# Altium PCB motordriver-v3.1_power-stage.PcbDoc
Units mil, origin at the board's own origin, x right, y up, seen from the top; angles counter-clockwise.
Board outline 6000 x 4000 mil, 2 copper layers (Top Layer, Bottom Layer); 18 components, 18 nets, 63 pads, 0 vias.
Unrouted connection lines stored in the file: 33.
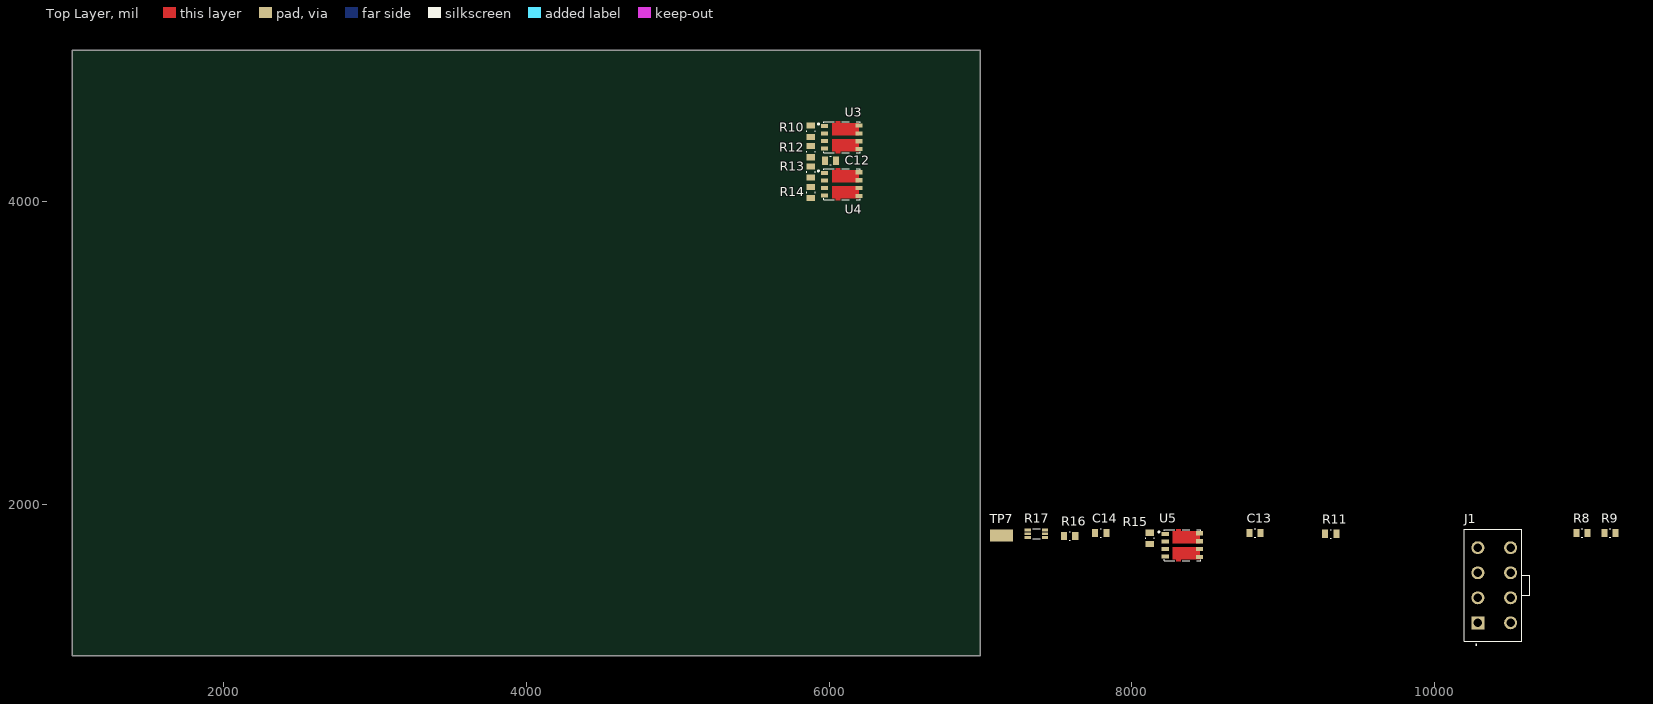
[diagram p0: Top Layer view]
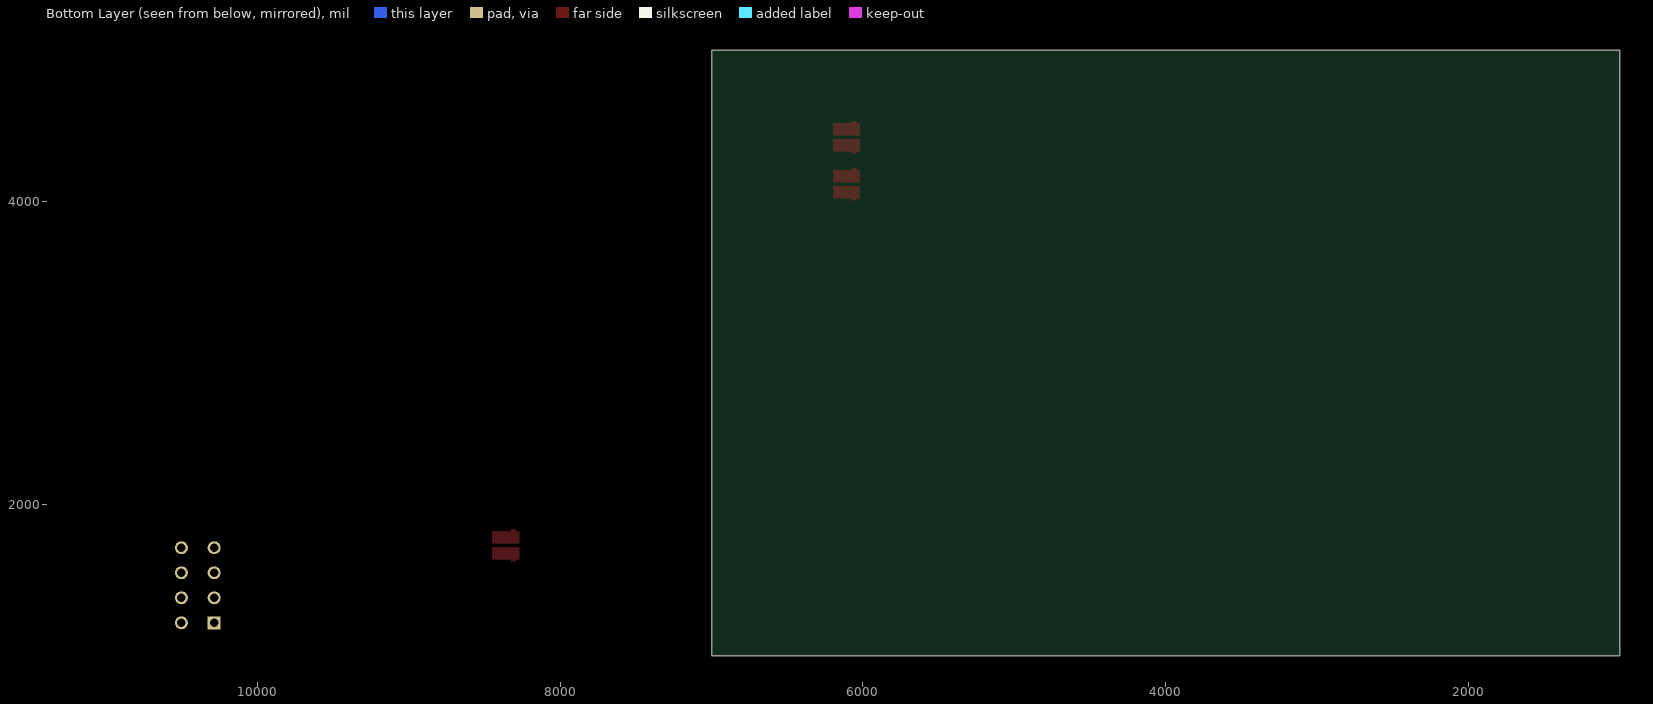
[diagram p1: Bottom Layer view, seen from below]

## Layer stack, top to bottom
Top Solder: solder mask 0.4, Solder Resist, Dk 3.5
Top Layer: signal copper 1.4
Dielectric 1: dielectric 12.6, FR-4, Dk 4.8
Bottom Layer: signal copper 1.4
Bottom Solder: solder mask 0.4, Solder Resist, Dk 3.5

## Board outline
1000,1000 7000,1000 7000,5000 1000,5000

## Design rules (kind name [scope] priority, off if disabled: settings)
Clearance [All] p1: gap=10 ignorepadtopadclearanceinfootprint=FALSE except(0: Arc-Hole Track-Hole SMDPad-Hole THPad-Hole Via-Hole Fill-Hole Poly-Hole Region-Hole Text-Hole)
PolygonConnect [All] p1: connectstyle=Relief reliefconductorwidth=10 reliefentries=4 polygonreliefangle="90 Angle" airgapwidth=10
RoomDefinition motordriver-v3.1_power-stage [InComponentClass('motordriver-v3.1_power-stage')] p1: confinementstyle=ConfineIn formatcopy=TRUE lockcomponents=FALSE outline 7045,1055 11595,1055 11595,1955 7045,1955
RoutingVias [All] p1: holewidth=28 width=50 viastyle="Through Hole" minholewidth=28 minwidth=50 maxholewidth=28 maxwidth=50
SolderMaskExpansion [All] p1: expansion=4 istentingtop=FALSE
Width [All] p1: maxlimit=10 minlimit=10 preferedwidth=10
30 further rules are at their usual default settings.

## Components (designator, comment, footprint, x,y, rotation, side; value= is the part's Value field where it differs from the comment)
C12 "100nF 50V" 0805 6010,4270 r0 top value=100nF
C13 "100nF 50V" 0805 8815,1810 r0 top value=100nF
C14 "100nF 50V" 0805 7795,1810 r0 top value=100nF
J1 "Motor Molex Connector" MOLEX_0039281083 10395,1465 r90 top value=N/A
R8 "10k" 0805 10975,1810 r0 top
R9 "10k" 0805 11160,1810 r0 top
R10 "495k" 0805 5880,4465 r270 top
R11 "10k" 0805 9315,1805 r0 top
R12 "495k" 0805 5880,4330 r270 top
R13 "495k" 0805 5880,4195 r270 top
R14 "495k" 0805 5880,4060 r270 top
R15 "495k" 0805 8120,1775 r270 top
R16 "495k" 0805 7590,1790 r0 top
R17 "RES 20m 1W" "1206 - Sense" 7370,1805 r0 top
TP7 "Test Point - 5019" TP380X203 7140,1795 r0 top
U3 "NOTE: Nearing End of Life" PG-TDSON-8-10 6085,4425 r0 top
U4 "NOTE: Nearing End of Life" PG-TDSON-8-10 6085,4115 r0 top
U5 "NOTE: Nearing End of Life" PG-TDSON-8-10 8335,1730 r0 top

## Footprints (in the part's own frame and the unit in brackets; to place one, negate y for a bottom-side part, rotate by r counter-clockwise, add the part's x,y. Pads: shape width x height; smd on the part's side, far side on the other; paste and mask are expansions set on the pad)
0805 [mil]
  rect 40x55 smd: 1(-37,0) 2(37,0)
  silkscreen extent -4,-28 4,28, body extent -47,-28 47,28, height 24
"1206 - Sense" [mil] "4-Wire Sense Footprint"
  rect 41.34x20 smd: 1(-57,-24) 1(-57,24) 2(57,-24) 2(57,24)
  rect 41.34x15 smd paste+0: 3(-57,0) 4(57,0)
  silkscreen extent -24,-33 24,33
MOLEX_0039281083 [mm]
  rect 2.175x2.175 hole 1.45: 1(-6.3,2.75)
  round 2.175 hole 1.45: 2(-2.1,2.75) 3(2.1,2.75) 4(6.3,2.75) 5(-6.3,-2.75) 6(-2.1,-2.75) 7(2.1,-2.75) 8(6.3,-2.75)
  silkscreen extent -10.1,-6 9.4,5
PG-TDSON-8-10 [mm] "Infineon specific mosfet array footprint"
  rect 1.2x0.65 smd: 1(-2.89,1.905) 2(-2.89,0.635) 3(-2.89,-0.635) 4(-2.89,-1.905)
  rect 1.2x0.7 smd: 6(2.89,-1.99) 6(2.89,-0.66) 8(2.89,0.66) 8(2.89,1.99)
  Top Layer region: -1.04,-2.7 -0.25,-2.7 -0.25,-2.1 -1.04,-2.1
  Top Layer region: -1.04,2.1 -0.25,2.1 -0.25,2.7 -1.04,2.7
  Top Layer region: -1.64,2.33 2.84,2.33 2.87,2.33 2.87,0.32 -1.62,0.32 -1.64,0.32 -1.64,0.34
  Top Layer region: -1.64,-0.32 2.84,-0.32 2.87,-0.32 2.87,-2.33 -1.62,-2.33 -1.64,-2.33 -1.64,-2.31
  silkscreen extent -4.04,-2.6 3.08,2.6
TP380X203 [mm]
  rect 3.8x2.03 smd: 1(0,0)

## Part data
C12 C13 C14: library part "CAP 100nF 50V", "CAP CER 0.1UF 50V X7R 0805", Package=0805, Rating=50V, Tolerance=10%
J1: library part "CN HDR 8POS Motor Molex", "Connector Header Through Hole 8 position 0.165\" (4.20mm)", Supplier Part Number 1=WM3803-ND, Digikey=WM3803-ND, Digikey Link=https://www.digikey.ca/products/en?keywords=WM3803-ND, MF=Molex, MP=0039281083, Price="1.624 CAD", Supplier 1=Digi-Key
R8 R9 R11: library part "RES 10k 1/8W - 1%", "RES SMD 10K OHM 1% 1/8W 0805", Package=0805, Power (Watts)=0.125W, Tolerance=1%
R10 R12 R13 R14 R15 R16: library part "RES 495k 1/8W", "RES SMD 499K OHM 1% 1/8W 0805", Case Code (Imperial)=0805, Case Code (Metric)=2012, Manufacturer=Yageo, Manufacturer Part Number=RC0805FR-07499KL, Max Operating Temperature=155°C, Min Operating Temperature=-55°C, Power Rating=125mW, Resistance=499kR, Supplier Part Number 1=311-499KCRCT-ND, Temperature Coefficient=100ppm/°C, Tolerance=1%, Voltage Rating=150V, Case/Package=0805, Category="Chip SMD Resistors", ComponentLink1Description=https://datasheet.ciiva.com/15189/getdatasheetpartid-326570-15189975.pdf?src-supplier=Verical, ComponentLink1URL=https://datasheet.ciiva.com/15189/getdatasheetpartid-326570-15189975.pdf?src-supplier=Verical, Composition="Thick Film", Contact Plating=Tin,Lead,Matte, Depth=1.25mm, Lead Free="Lead Free", Length=2mm, Military Standard=Not, Packaging="Tape and Reel", Pricing 1="1=0.10000, 10=0.04000, 100=0.01630, 1000=0.00731, 2500=0.00635 (USD)", Radiation Hardening=No, RoHS=Yes, Stock 1=2275, Supplier 1=Digi-Key, Termination=SMD/SMT, Voltage Rating (DC)=150V
R17: "RES SMD 0.02 OHM 1% 1W 1206"
TP7: "PC Test Point, Miniature Phosphor Bronze, Silver Plating Surface Mount Mounting Type", Package="2010 Keystone", Digi-Key_Part_Number=36-5019CT-ND, Digi-Key_Purchase_URL=https://www.digikey.com/product-detail/en/keystone-electronics/5019/36-5019CT-ND/3907344?utm_source=snapeda&utm_medium=aggregator&utm_campaign=symbol, MF="Keystone Electronics", MP=5019
U3 U4 U5: library part "MOSFET IPG20N06S4-15A", "MOSFET N+N 60V 20A", Supplier Part Number 1=726-IPG20N06S415ATMA, MF="Infineon Technologies", MF P/N=IPG20N06S4-15A, Supplier 1=Mouser

## Nets (pads, with @x,y where several pads share a name; then routed paths per layer and width w, separated by ;. In a path a pad name is that pad's centre, name@x,y a point inside that pad or via, vN(x,y) a via of type N, cw(c..) or ccw(c..) an arc to the next point about the centre after c; other vN are vias at no path point)
5V: J1.3 R11.1
CSN: R17.4
CSP: R17.3
GHA: R10.2 U3.2
GHB: R13.2 U4.2
GHC: R15.2 U5.2
GLA: R12.2 U3.4
GLB: R14.2 U4.4
GLC: R16.2 U5.4
GND: J1.6 R17.2 TP7.1
H1: J1.1
H2: J1.2 R8.2
H3: J1.5 R9.2
NetC12_1: C12.1 C13.1 C14.1 R12.1 R14.1 R16.1 U3.3 U4.3 U5.3
SA: J1.7 R10.1 U3.1 U3.6
SB: J1.8 R13.1 U4.1 U4.6
SC: J1.4 R15.1 U5.1 U5.6
VCC: C12.2 C13.2 U3.8 U4.8 U5.8
pads on no net: C14.2 R8.1 R9.1 R11.2 R17.1